# EAGLE board Ingenious Leelo (1) (EAGLE 7.6.0)

Size 56.82 x 53.33 mm. Coordinates in mm from the lower left corner, seen from the top.
Outline: 0,0 56.82,0 56.82,53.33 0,53.33 0,0
Copper layers (1*16): Top 0.035mm / dielectric 1.5mm / Bottom 0.035mm
Design rules "default": minimum track width 10mil, minimum drill 24mil, track to track 8mil, track to pad 8mil, pad to pad 8mil, via to via 8mil, smd to smd 8mil, copper to edge 40mil, drill to drill 8mil, minimum pad ring 10mil, minimum via ring 8mil, stop-mask expansion 4mil, vias tented up to drill 0mil, thermal gap 10mil

## Footprints (pad centres in the part's own frame; a part is rotated, then mirrored left to right if it is on the bottom)
LED5MM = drill 0.813 octagon: A -1.27,0; K 1.27,0
0207/10 = drill 0.813 octagon: 1 -5.08,0; 2 5.08,0
DIP04YL = drill 0.813 long: 1 -3.81,-3.81; 2 -1.27,-3.81; 3 1.27,-3.81; 4 3.81,-3.81; 5 3.81,3.81; 6 1.27,3.81; 7 -1.27,3.81; 8 -3.81,3.81
DIL14 = drill 0.813 long: 1 -7.62,-3.81; 2 -5.08,-3.81; 3 -2.54,-3.81; 4 0,-3.81; 5 2.54,-3.81; 6 5.08,-3.81; 7 7.62,-3.81; 8 7.62,3.81; 9 5.08,3.81; 10 2.54,3.81; 11 0,3.81; 12 -2.54,3.81; 13 -5.08,3.81; 14 -7.62,3.81

## Placement (x,y rotation side)
D1  [LED5MM]  5,111.68 0 top  (outside the outline)
D2  [LED5MM]  5,162.48 0 top  (outside the outline)
R1  1k‎Ω  [0207/10]  5,22.78 0 top
R2  1k‎Ω  [0207/10]  5,35.48 0 top
R3  1k‎Ω  [0207/10]  5,124.38 0 top  (outside the outline)
R4  1k‎Ω  [0207/10]  5,137.08 0 top  (outside the outline)
R5  1k‎Ω  [0207/10]  5,98.98 0 top  (outside the outline)
R8  1k‎Ω  [0207/10]  5,149.78 0 top  (outside the outline)
SW1  [DIP04YL]  5,10.08 0 top
SW2  [DIP04YL]  5,60.88 0 top  (outside the outline)
U1  [DIL14]  5,48.18 0 top
U2  [DIL14]  5,73.58 0 top  (outside the outline)
U3  [DIL14]  5,86.28 0 top  (outside the outline)

## Library data of the parts
D1 D2 R1-R5 R8 SW1 SW2 U1-U3 = AUTODESK_CIRCUITS_BREADBOARD

## Nets
N$1: R1.1 SW1.6 U1.1
N$2: SW1.7
N$3: U1.3 U1.5
N$4: U1.2 U1.6 U3.11
N$5: SW2.8
N$6: R3.1 SW2.5 U2.12
N$7: SW2.1
N$8: SW2.2
N$9: R4.1 SW2.6 U2.13
N$10: SW2.7
N$11: U2.6
N$12: R5.2 U2.8 U3.12
N$13: R8.2 U2.9 U3.9
N$14: U2.1
N$15: U2.4
N$16: U2.10 U2.11
N$17: U2.2
N$18: U2.5
N$19: U2.3
N$20: U3.3
N$21: U3.1
N$22: U3.6
N$23: U3.5
N$24: U3.8
N$25: U3.2
N$26: U3.4
N$27: D1.A
N$28: SW1.8
N$29: R2.1 SW1.5 U1.4
N$30: R1.2 R2.2 R3.2 R4.2 U2.14 U3.10 U3.13 U3.14
N$31: D1.K D2.A D2.K R8.1 SW1.1 SW1.2 SW1.3 SW1.4 SW2.3 SW2.4 U1.7 U2.7 U3.7

## Tracks (layer width: path | path; a pad name or v marks a point on that pad's centre or on a via)
N$1  (2 unrouted)
N$3  (1 unrouted)
N$4  (2 unrouted)
N$6  (2 unrouted)
N$9  (2 unrouted)
N$12  (2 unrouted)
N$13  (2 unrouted)
N$16  (1 unrouted)
N$29  (2 unrouted)
N$30  (7 unrouted)
N$31  (12 unrouted)